# EAGLE board C12666-vertical (EAGLE 7.7.0)
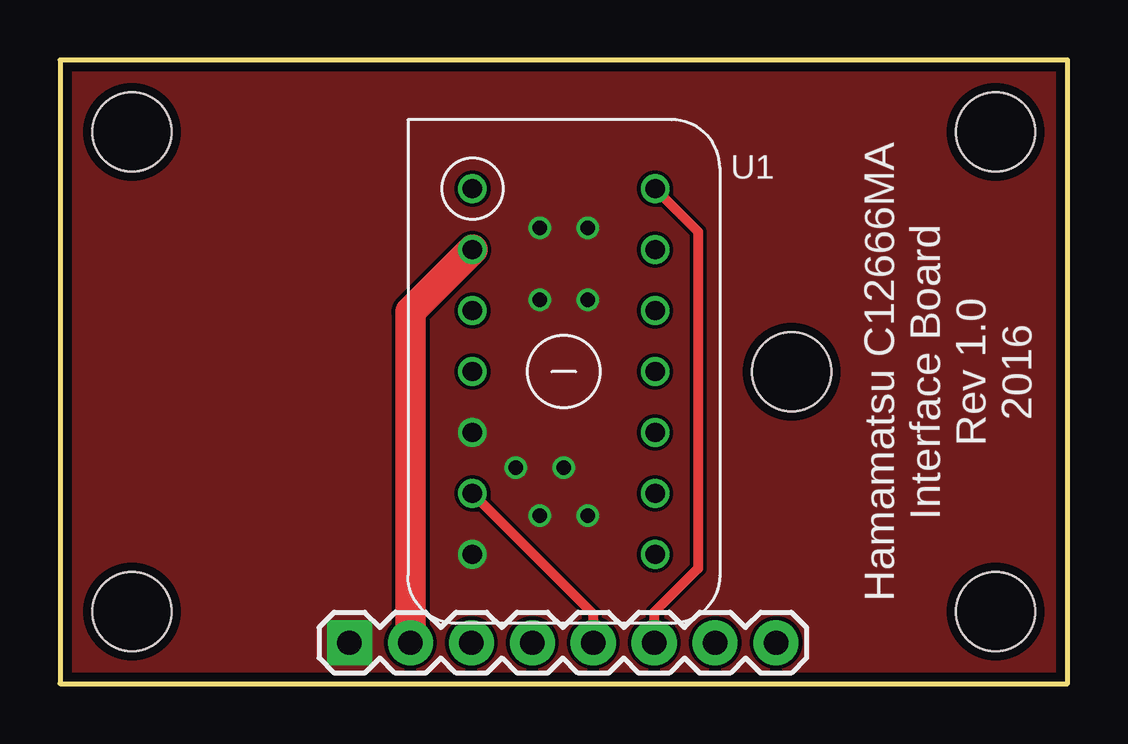
[diagram p0: board, top side]
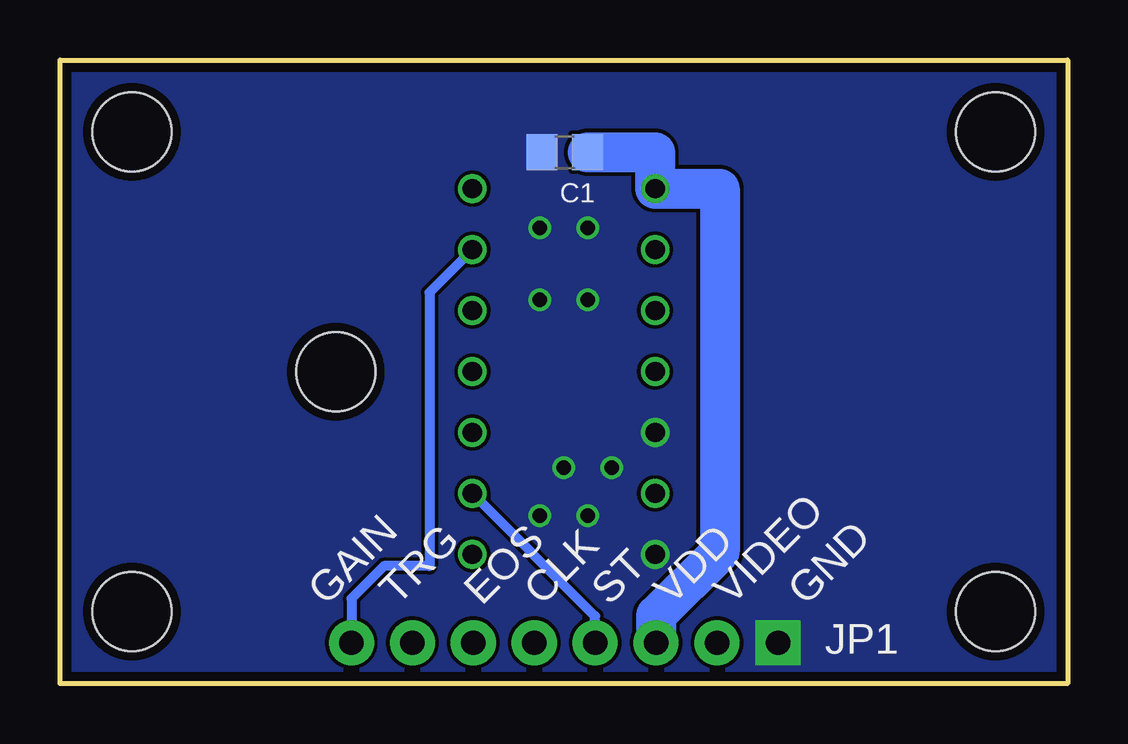
[diagram p1: board, bottom side, seen from below]

Size 42 x 26 mm. Coordinates in mm from the lower left corner, seen from the top.
Outline: 0,0 42,0 42,26 0,26 0,0
Copper layers (1*16): Top 0.0356mm / dielectric 1.5011mm / Bottom 0.0356mm
Design rules "oshpark-2layer": minimum track width 6mil, minimum drill 13mil, track to track 6mil, track to pad 6mil, pad to pad 6mil, via to via 6mil, smd to smd 6mil, copper to edge 15mil, drill to drill 6mil, minimum pad ring 7mil, minimum via ring 7mil, stop-mask expansion 2.5mil, vias tented up to drill 0mil, thermal gap 10mil

## Footprints (pad centres in the part's own frame; a part is rotated, then mirrored left to right if it is on the bottom)
C0805 = smd 1.3 x 1.5: 1 -0.95,0; 2 0.95,0
1X08 = drill 1.016 pad 1.88 square: 1 0,0 | drill 1.016 pad 1.88: 2 2.54,0; 3 5.08,0; 4 7.62,0; 5 10.16,0; 6 12.7,0; 7 15.24,0; 8 17.78,0
STAND-OFF = hole 3.302: 0,0
C12666MA = drill 0.8: 1 -7.62,-3.81; 2 -5.08,-3.81; 3 2.54,-3.81; 4 5.08,-3.81; 5 7.62,-3.81; 6 7.62,3.81; 7 5.08,3.81; 8 2.54,3.81; 9 -5.08,3.81; 10 -7.62,3.81; 11 -2.54,3.81; 12 0,3.81; 13 -2.54,-3.81; 14 0,-3.81

## Placement (x,y rotation side)
C1  0.1 uF  [C0805]  20.96,22.15 180 bottom
JP1  [1X08]  12.07,1.7 0 top
STANDOFF1  STAND-OFF  [STAND-OFF]  3,23 0 top
STANDOFF2  STAND-OFF  [STAND-OFF]  39,23 0 top
STANDOFF3  STAND-OFF  [STAND-OFF]  39,3 0 top
STANDOFF4  STAND-OFF  [STAND-OFF]  3,3 90 top
STANDOFF5  STAND-OFF  [STAND-OFF]  30.5,13 90 top
U1  MICROSPEC-C12666MA  [C12666MA]  21,13.01 270 top

## Library data of the parts
C1 STANDOFF1-STANDOFF5 = Spectron2
JP1 = Spectron2; PROD_ID: CONN-08438
U1 = Spectron

## Nets
CLK: JP1.5 U1.4
EOS: JP1.6 U1.10
GAIN: JP1.8 U1.9
GND: C1.2 JP1.1 U1.3 U1.5
ST: JP1.4 U1.7
TRG: JP1.7
VDD: C1.1 JP1.3 U1.1
VIDEO: JP1.2 U1.2

## Tracks (layer width: path | path; a pad name or v marks a point on that pad's centre or on a via)
CLK
  Top 0.406: JP1.5 22.23,2.89 U1.4
EOS
  Top 0.406: U1.10 26.6,18.84 26.6,4.8 24.77,2.97 JP1.6
GAIN
  Bottom 0.406: U1.9 26.6,16.3 26.6,4.9 28.5,4.9 29.85,3.55 JP1.8
GND  (via drill 0.6)
  other vias: 20,19 22,19 20,16 22,16 19,9 21,9 22,7 20,7
  pour Bottom (no thermals): 0.2,25.8 41.8,25.8 41.8,0.2 0.2,0.2
  pour Top (no thermals): 0.2,25.8 41.8,25.8 41.8,0.3 0.2,0.3
ST
  Bottom 0.406: JP1.4 19.69,2.81 U1.7
VDD
  Bottom 1.676: C1.1 17.19,22.15 U1.1 14.5,20.63 14.5,5.5 17.15,2.85 JP1.3
VIDEO
  Top 1.27: U1.2 14.61,15.51 JP1.2

## Text on the board
tPlace: Hamamatsu C12666MA / Interface Board / Rev 1.0 / 2016
bPlace: GND | VIDEO | VDD | ST | CLK | EOS | TRG | GAIN